# Altium PCB УШЯИ 758725.629-2.PcbDoc (part 2 of 2)
Units mm, origin at the board's own origin, x right, y up, seen from the top; angles counter-clockwise.
Board outline 110 x 150 mm, 2 copper layers (Top Layer, Bottom Layer), stack 1.569 mm thick; 205 components, 137 nets, 716 pads, 161 vias.
Unrouted connection lines stored in the file: 8.
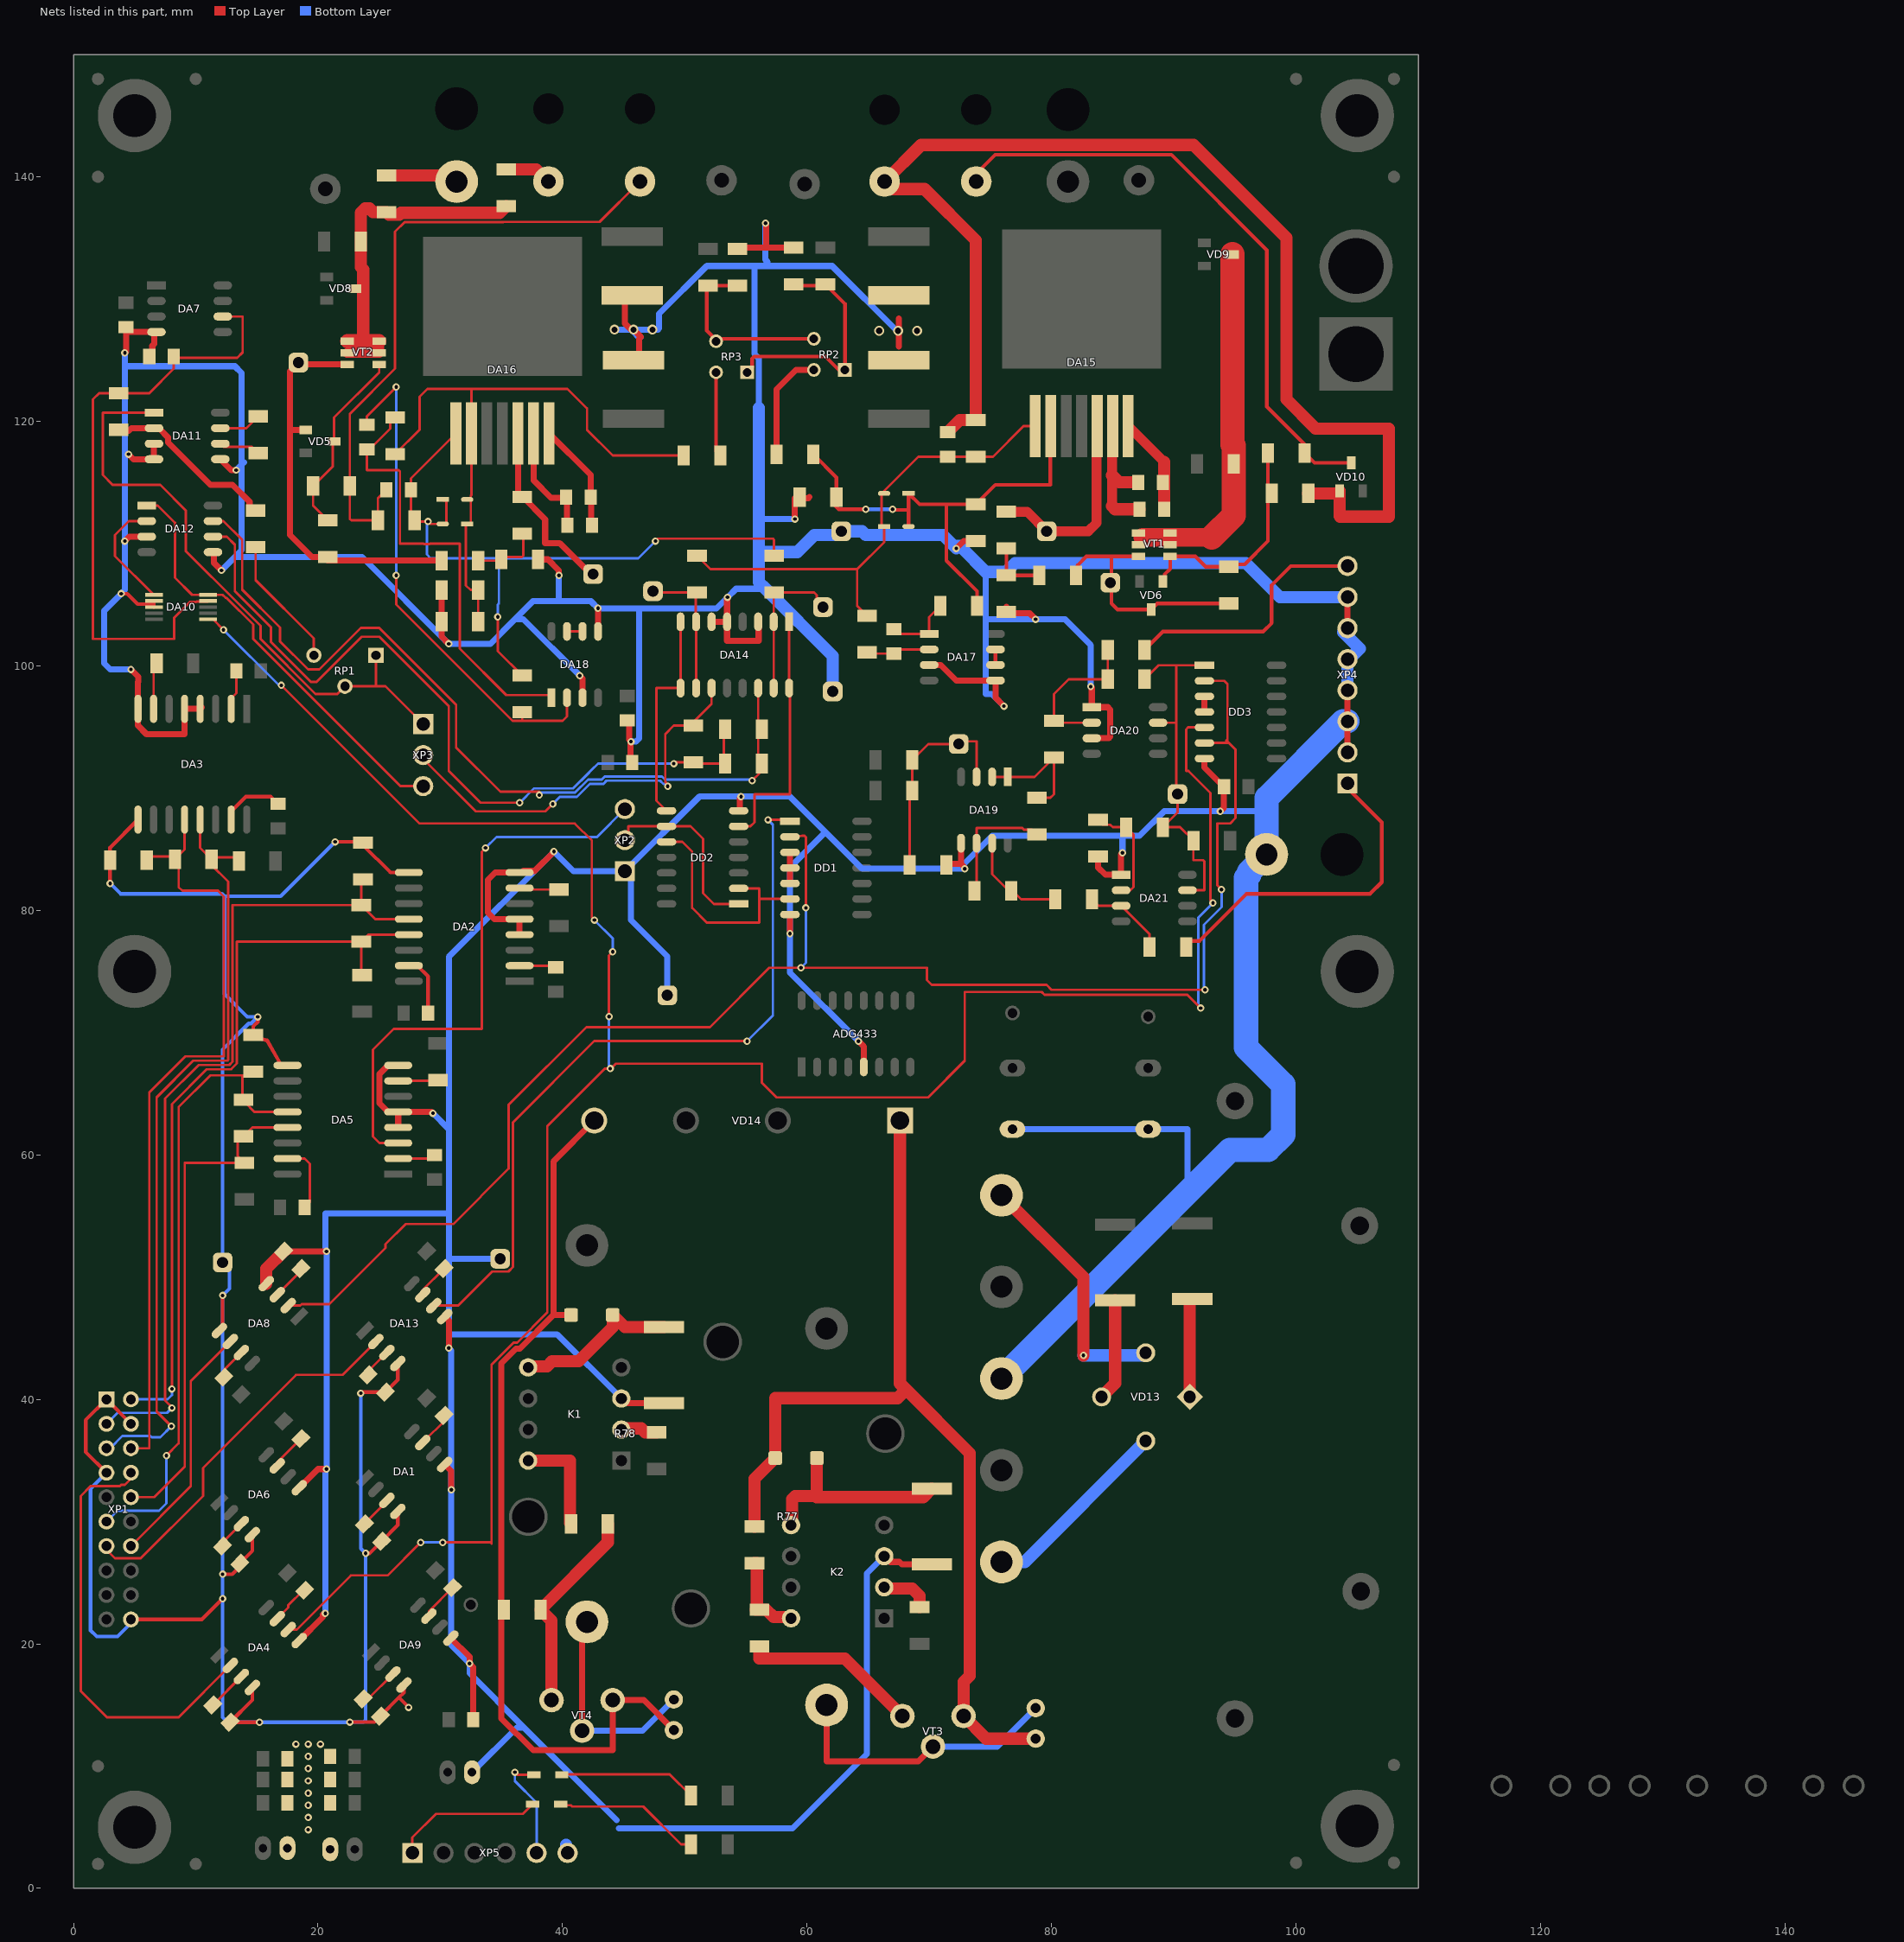
[diagram p2: the nets of this part, all layers, seen from the top]

## Via types
v1: diameter 0.6, hole 0.3, Top Layer to Bottom Layer, 155 vias
v2: diameter 0.8, hole 0.5, Top Layer to Bottom Layer, 6 vias

## Nets (pads, with @x,y where several pads share a name; then routed paths per layer and width w, separated by ;. In a path a pad name is that pad's centre, name@x,y a point inside that pad or via, vN(x,y) a via of type N, cw(c..) or ccw(c..) an arc to the next point about the centre after c; other vN are vias at no path point) (continued)
ENB_DA2: DA4.6 DA10.6 DD3.5 | length 205.2
  Top Layer w0.2: DA10.6@11.025,103.8 11.411,103.8 v1(12.267,102.944) ; v1(17,98.4) 28.3,87.1 41,87.1 42.4,85.7 42.4,79.4 v1(42.6,79.2) ; DA4.6@17.567,21.169 18.269,21.169 22.7,25.6 25.7,25.6 v1(28.4,28.3) ; v1(30.2,28.3) 34.1,28.3 34.2,28.2 34.2,42.853 35.997,44.65 36.296,44.65 38.753,47.107 38.753,62.353 43.45,67.05 43.949,67.05 44.349,67.45 56.3,67.45 56.3,65.9 57.5,64.7 69.9,64.7 72.9,67.7 72.9,73.324 79.191,73.324 79.416,73.1 91.1,73.1 v1(92.2,72) ; v1(43.8,71.3) 43.8,76.3 v1(44.1,76.6) ; DD3.5@92.5,94.96 91.16,94.96 91,94.8 91,91.4 91.2,91.4 93,89.6 93,80.8 v1(93.2,80.6)
  Bottom Layer w0.2: v1(12.267,102.944) 16.811,98.4 v1(17,98.4) ; v1(28.4,28.3) v1(30.2,28.3) ; v1(42.6,79.2) 44.1,77.7 v1(44.1,76.6) ; v1(43.8,71.3) 43.8,67.15 v1(43.9,67.05) ; v1(92.2,72) 92,72.2 92,79.4 v1(93.2,80.6)
GND: ADG433.5 C12.2 C16.1 C17.1 C22.1 C23.1 C26.1 C29.2 C30.1 C31.2 C36.1 C37.1 C38.2 C39.2 C40.1 C41.2 C42.2 C43.1 C44.2 C45.2 C46.1 C47.1 C48.1 C49.2 C50.1 C51.2 C54.2 DA1.5 DA2.4 DA2.5 DA2.8 DA3.4 DA3.5 DA3.8 DA4.5 DA5.4 DA5.5 DA5.8 DA6.5 DA7.4 DA8.4 DA9.5 DA10.2 DA10.3 DA11.3 DA11.4 DA11.5 DA12.3 DA12.5 DA13.5 DA14.3 DA14.5 DA14.6 DA17.3 DA17.5 DA18.3 DA18.5 DA19.5 DA20.1 DA20.3 DA21.1 DD1.7 DD2.7 DD3.7 K1.3 K2.3 kt??.1 pad.4 pad.TH@75.9,41.7 R19.1 R20.2 R24.1 R27.1 R56.1 R67.2 R68.1 R69.1 XP2.1 XP4.2 XP4.3 XP4.4 XP4.5 XP4.6 XP4.7 XP5.6 КТ9.1 КТ10.1 КТ12.1 | length 848.7
  Top Layer w0.2: DA18.3@41.635,97.388 DA18.3@41.635,97.888
  Top Layer w0.3: v1(3.9,105.9) 4.4,105.9 5.25,105.05 6.575,105.05 ; DA10.3@6.575,104.8 6.575,105.05 ; DA10.2@6.575,105.3 6.575,105.05
  Top Layer w0.5: v1(4.2,110.2) 4.565,110.565 DA12.3@5.988,110.565 ; v1(4.2,125.6) 4.3,125.7 C12.2@4.3,127.7 4.304,127.696 4.304,127.297 DA7.4@6.683,127.297 ; v1(4.5,117.3) 4.905,116.895 DA11.4@6.588,116.895 DA11.3@6.588,118.165 ; v1(4.7,99.7) 5.3,99.1 5.3,98.7 5.28,98.68 DA3.8@5.28,96.476 5.28,95.1 5.99,94.39 9.09,94.39 DA3.5@9.09,96.476 DA3.4@10.36,96.476 DA3.4@10.49,96.606 ; C16.1@6.2,125.3 6.45,125.55 6.45,126.175 6.614,126.339 6.614,127.228 DA7.4@6.683,127.297 ; DA7.4@7.034,127.297 DA7.4@6.787,127.297 DA7.4@6.683,127.297 ; DA12.5@11.412,109.295 11.5,109.207 11.5,108.4 v1(12.1,107.8) ; DA11.5@12.012,116.895 12.8,116.107 12.8,116.1 12.9,116 v1(13.3,116) ; C17.1@17.193,52.107 20.693,52.107 v1(20.7,52.1) ; DA4.5@18.465,20.271 20.4,22.206 20.4,22.4 20.5,22.5 v1(20.6,22.5) ; DA6.5@18.465,32.771 19.994,34.3 v1(20.7,34.3) ; DA5.4@26.562,62.237 DA5.5@26.562,63.507 ; DA5.8@26.562,67.317 25.726,67.317 25.013,66.604 25.013,64.22 25.726,63.507 DA5.5@26.562,63.507 ; v1(29.4,63.4) 29.293,63.507 DA5.5@26.562,63.507 ; R27.1@30.1,106.2 C23.1@30.1,103.6 30.1,102.4 v1(30.7,101.8) ; DA1.5@30.365,34.671 30.9,34.135 v1(30.9,32.6) ; DA13.5@30.365,46.771 30.7,46.435 v1(30.7,44.2) ; DA9.5@30.865,20.471 32.4,18.935 v1(32.4,18.4) 32.7,18.1 C48.1@32.7,13.8 ; DA2.4@36.484,78.011 DA2.5@36.484,79.281 34.419,79.281 33.9,79.8 33.9,82.5 34.491,83.091 DA2.8@36.484,83.091 36.928,83.091 36.8,83.219 37.719,83.219 v1(39.3,84.8) ; C36.1@38,108.7 38.8,108.7 39.7,107.8 v1(39.7,107.4) ; v1(41.4,99.2) 41.635,98.965 DA18.3@41.635,97.888 ; v1(42.9,104.7) 42.905,104.695 DA18.5@42.905,102.812 ; K1.3@44.81,40.07 45.18,39.7 R69.1@48.3,39.7 ; C42.2@45.3,95.534 45.466,95.534 45.466,93.934 v1(45.6,93.8) 45.55,93.75 45.55,92.25 C41.2@45.7,92.1 ; C31.2@45.7,130.3 45.6,130.3 45.1,129.8 45.1,128 45.6,127.5 v2(45.8,127.5) 46.4,126.9 46.25,126.75 46.25,125.45 C30.1@45.8,125 ; DA14.6@52.19,103.6 DA14.5@53.46,103.6 ; v1(53.5,105.6) 53.46,105.56 DA14.5@53.46,103.6 ; R19.1@54.3,134.1 54.4,134.2 56.65,134.2 ; DD2.7@54.4,88.14 54.5,88.24 54.5,89.2 v1(54.6,89.3) ; DA14.3@56,103.6 56.04,103.56 56.04,102.04 53.46,102.04 DA14.5@53.46,103.6 ; v1(56.6,136.2) 56.65,136.15 56.65,134.2 ; v1(58.6,78.1) DD1.7@58.6,79.66 ; R20.2@58.9,134.2 56.65,134.2 ; v1(59,112) 59,113.7 60.1,113.7 60.2,113.8 ; v1(64.2,69.3) 64.635,68.865 ADG433.5@64.635,67.188 ; K2.3@66.31,27.17 66.345,27.17 66.815,26.7 67.55,26.7 67.75,26.5 R68.1@70.2,26.5 ; 67.5,126.1 67.5,127.25 67.5,128.4 ; DA17.3@69.988,100.065 70.935,100.065 72.205,98.795 DA17.5@75.412,98.795 75.412,97.388 v1(76.1,96.7) ; R56.1@71.4,83.7 71.495,83.795 72.595,83.795 ; v1(72.2,109.6) 72.8,110.2 C22.1@73.8,110.2 ; DA19.5@72.595,85.488 72.595,83.795 ; v1(72.9,83.4) 72.9,83.49 72.595,83.795 ; C37.1@76.3,104.834 C37.1@76.3,104.4 76.3,104.3 78.2,104.3 v1(78.7,103.8) ; v1(83.2,98.3) 83.288,98.212 DA20.1@83.288,96.611 84.595,96.611 84.8,96.406 84.8,94.2 84.671,94.071 DA20.3@83.288,94.071 ; R67.2@83.8,84.4 83.8,83.5 84.395,82.905 DA21.1@85.688,82.905 85.688,84.588 v1(85.8,84.7) ; DD3.7@92.5,92.42 92.5,91.68 C54.2@94.09,90.09 ; v1(93.8,88.1) 94.1,88.4 C54.2@94.1,90.1 ; XP4.2@104.2,92.92 XP4.4@104.2,98 ; XP4.6@104.2,103.08 XP4.7@104.2,105.62
  Top Layer w1: DA8.4@15.771,49.465 15.771,50.685 C17.1@17.193,52.107
  Bottom Layer w0.5: v1(4.2,125.6) 4.2,124.5 ; v1(4.7,99.7) 3,99.7 2.5,100.2 2.5,104.5 v1(3.9,105.9) 4.2,106.2 v1(4.2,110.2) 4.2,124.5 ; v1(12.1,107.8) 13.201,108.901 ; v1(13.3,116) 13.75,116.45 ; 13.95,116.65 13.75,116.45 ; v1(20.6,22.5) 20.6,34.2 v1(20.7,34.3) v1@20.7,52 ; v1(20.7,52.1) v1@20.7,52 ; v1(29.4,63.4) 30.7,62.1 ; C39.2@32.6,9.5 36.25,13.15 36.85,13.15 ; КТ10.1@34.9,51.5 30.7,51.5 ; v1(39.7,107.4) 39.7,105.451 39.876,105.276 ; v1(41.4,99.2) 36.8,103.8 36.1,103.8 ; v2(44.25,127.5) 45.65,127.5 45.75,127.6 45.85,127.5 v2(47.35,127.5) 47.8,127.5 47.9,127.6 47.9,128.8 51.8,132.7 55.7,132.7 ; 44.417,5.583 36.843,13.157 32.4,17.6 v1(32.4,18.4) 30.9,19.9 v1(30.9,32.6) 30.9,44 v1(30.7,44.2) 30.7,45.318 ; 44.6,4.9 58.8,4.9 64.9,11 64.9,25.76 K2.3@66.31,27.17 ; K1.3@44.81,40.07 39.562,45.318 30.7,45.318 ; v1(45.6,93.8) 46.029,93.8 46.269,94.039 46.269,104.7 ; v2(45.8,127.5) 45.8,127.3 46.2,126.9 46.4,126.9 ; КТ12.1@48.567,73.05 48.567,76.233 45.6,79.2 45.6,82.7 XP2.1@45.1,83.2 ; 56.06,111.8 56.26,112 v1(59,112) ; 56.06,121.1 56.06,125.141 55.7,125.501 55.7,132.7 ; 56.6,106.3 54.2,106.3 v1(53.5,105.6) 52.6,104.7 46.269,104.7 ; v1(56.6,136.2) 56.6,133.2 56.75,133.05 56.75,132.7 ; v1(64.2,69.3) 58.6,74.9 v1(58.6,78.1) 58.6,83.5 61.495,86.395 ; v2@67.45,127.3 v2(67.45,127.4) ; v2@67.5,127.25 62.05,132.7 56.75,132.7 ; v1(72.2,109.6) 72.7,109.6 ; v1(72.9,83.4) 72.445,83.4 ; 74.621,107.679 74.621,103.889 ; v1(76.1,96.7) 75.1,97.7 74.621,97.7 74.621,103.889 ; C46.1@76.8,62.1 C45.2@87.9,62.1 91.119,62.1 91.119,58.081 91.7,57.5 ; v1(83.2,98.3) 83.2,101.7 81.1,103.8 v1(78.7,103.8) 74.711,103.8 74.621,103.889 ; v1(85.8,84.7) 85.8,86.1 ; 97.9,88.1 v1(93.8,88.1) 89.2,88.1 87.2,86.1 85.8,86.1 ; 4.2,124.5 13.2,124.5 13.75,123.95 13.75,116.45 ; 13.201,108.901 23.599,108.901 v1(30.7,101.8) 34.1,101.8 36.1,103.8 ; 13.201,108.901 13.75,109.45 13.75,116.45 ; v1@20.7,52 20.6,52.1 20.6,55.2 23.26,55.2 23.272,55.212 23.728,55.212 23.74,55.2 30.7,55.2 ; 30.7,45.318 30.7,51.5 ; 30.7,51.5 30.7,55.2 ; 30.7,55.2 30.7,62.1 ; 30.7,62.1 30.7,76.2 v1(39.3,84.8) 40.9,83.2 XP2.1@45.1,83.2 ; 36.1,103.8 37.576,105.276 39.876,105.276 ; 39.876,105.276 42.324,105.276 v1(42.9,104.7) 46.269,104.7 ; XP2.1@45.1,83.2 51.2,89.3 v1(54.6,89.3) 58.59,89.3 61.495,86.395 ; 55.7,132.7 56.75,132.7 ; 61.495,86.395 64.49,83.4 72.445,83.4 ; 72.445,83.4 75.145,86.1 85.8,86.1
  Bottom Layer w1: XP5.6@40.296,3.579 40.296,3.024 XP5.6@40.42,2.9 ; 56.06,121.1 56.06,111.8 56.06,109.3 ; КТ9.1@62.1,97.9 62.1,100.8 56.6,106.3 56.06,106.84 56.06,109.3 ; v1(72.2,109.6) 71.1,110.7 64.8,110.7 64.5,111 kt??.1@62.8,111 62.5,110.7 60.6,110.7 59.2,109.3 56.06,109.3 ; v1@72.2,109.8 72.7,109.8 ; 72.7,109.6 74.621,107.679 76.294,107.679 77.015,108.4 95.9,108.4 98.68,105.62 XP4.7@104.2,105.62 ; XP4.6@103.86,102.74 105.2,101.4 104.2,100.4 XP4.4@104.2,98
  Bottom Layer w2: pad.TH@75.9,41.7 91.7,57.5 94.6,60.4 97.7,60.4 98.951,61.651 98.951,65.749 95.9,68.8 95.9,82.649 96.15,82.899 96.15,83.133 pad.4@97.585,84.568 97.585,89.185 103.86,95.46 XP4.3@104.2,95.46
  other v1: 19.2,4.8 19.2,5.8 19.2,6.8 19.2,7.8 19.2,8.8 19.2,9.8 19.2,10.8 18.2,11.8 19.2,11.8 20.2,11.8
  other v2: 65.9,127.4 69,127.4
GNDN: C1.1 C5.1 C7.1 C15.1 C19.1 DA1.4 DA2.9 DA3.9 DA4.4 DA5.9 DA6.4 DA8.5 DA9.4 DA13.4 R2.1 R4.1 R6.1 XP1.1 XP1.4 XP1.7 XP1.20 КТ1.1 | length 215.4
  Top Layer w0.3: XP1.7@2.7,34 1,35.7 1,38.3 XP1.1@2.7,40 XP1.4@4.7,38 ; v1(3,82.2) 2.991,82.209 R4.1@2.991,84.097 2.991,85.131 DA3.9@5.28,87.42 ; XP1.20@4.7,22 10.5,22 v1(12.2,23.7) ; DA8.5@11.935,45.629 12.2,45.894 v1(12.2,48.5) ; v1(12.2,25.7) 12.99,25.7 C7.1@13.745,26.455 ; C7.1@13.607,26.593 14.629,27.615 DA6.4@14.629,28.935 ; DA4.4@14.629,16.435 14.629,15.415 C5.1@12.807,13.593 v1(15.207,13.593) ; R6.1@14.666,69.674 15.829,69.362 16.92,67.474 DA5.9@17.506,67.317 ; R6.1@14.7,69.8 14.7,70.5 15.071,70.871 v1(15.071,71.282) ; v1(21.4,85.6) 23.602,85.6 R2.1@23.68,85.521 ; v1(22.6,13.6) 24.614,13.6 C15.1@25.107,14.093 26.623,15.609 ; v1(23.5,40.5) 23.586,40.586 C19.1@25.514,40.586 26.529,41.601 DA13.4@26.529,42.935 ; R2.1@23.692,85.332 25.932,83.091 DA2.9@27.428,83.091 ; v1(23.9,27.4) 24.214,27.4 C1.1@25.207,28.393 26.529,29.715 DA1.4@26.529,30.835 ; DA9.4@27.029,16.635 27.029,16.015 26.623,15.609 ; v1(27.4,14.8) 27.4,14.832 26.623,15.609
  Bottom Layer w0.3: XP1.7@2.7,34 1.4,32.7 1.4,21.1 1.9,20.6 3.6,20.6 4.7,21.7 XP1.20@4.7,22 ; v1(3,82.2) 3.85,81.35 12.145,81.35 12.35,81.145 ; v1(21.4,85.6) 16.945,81.145 12.35,81.145 ; v1@23.5,40.543 v1(23.5,40.5) 23.5,27.8 v1(23.9,27.4) 23.9,13.785 23.715,13.6 22.615,13.6 22.565,13.65 22.512,13.596 15.211,13.596 v1(15.207,13.593) 12.6,13.593 12.2,13.993 12.2,23.69 v1(12.2,23.7) v1(12.2,25.7) v1(12.2,48.5) 12.75,49.05 12.75,50.65 КТ1.1@12.2,51.2 12.2,68.611 14.335,70.746 14.535,70.746 v1(15.071,71.282) 14.2,71.282 14.2,71.3 12.35,73.15 12.35,81.145
IMPc: DA5.3 XP2.3 | length 46.6
  Top Layer w0.2: DA5.3@26.562,60.967 25.033,60.967 24.5,61.5 24.5,68.6 26.2,70.3 33.4,70.3 33.4,79.593 33.4,84.8 v1(33.7,85.1)
  Bottom Layer w0.2: v1(33.7,85.1) 34.6,86 42.82,86 XP2.3@45.1,88.28
LIMIT: DA13.6 DD1.1 | length 62.5
  Top Layer w0.2: DA13.6@29.467,47.669 31.469,47.669 34.25,50.45 35.569,50.45 35.95,50.831 35.95,62.65 42.6,69.3 v1(55.1,69.3) ; v1(56.8,87.4) 57.98,87.4 58.1,87.28 DD1.1@58.6,87.28
  Bottom Layer w0.2: v1(55.1,69.3) 57.2,71.4 57.2,87 v1(56.8,87.4)
LIMITn: DA13.2 XP1.13 | length 31.3
  Top Layer w0.2: XP1.13@2.7,28 2.7,27.7 3.4,27 5.5,27 10.6,32.1 10.6,34.4 18.2,42 22.002,42 DA13.2@24.733,44.731
LM+: R63.2 XP4.1 | length 27.5
  Top Layer w0.3: R63.2@91,77 91,77.15 91.35,77.5 92.1,77.5 95.95,81.35 106.05,81.35 107,82.3 107,87.2 104.2,90 XP4.1@104.2,90.38
LM-: R61.1 XP4.8 | length 21.3
  Top Layer w0.3: R61.1@87.6,101.3 89.1,102.8 97.3,102.8 98,103.5 98,106.6 99.56,108.16 XP4.8@104.2,108.16
Net2: pad.2 R48.2 VD10.3 | length 52.7
  Top Layer w0.2: pad.2@73.839,139.606 pad.2@74.475,139.606
  Top Layer w0.3: pad.2@74.475,139.606 74.025,139.156 73.652,139.156 73.389,139.42 73.389,139.792 75.396,141.8 89.8,141.8 97.606,133.994 97.606,121.194 100.7,118.1 R48.2@100.7,117.4 101.5,116.6 VD10.3@104.5,116.6
Net3: C24.2 pad.3 R28.2 R47.1 VD10.1 | length 102.7
  Top Layer w1: C24.2@71.5,119.1 72.5,120.1 R28.2@73.8,120.1 73.8,134.8 69.61,138.99 66.954,138.99 pad.3@66.338,139.606 69.332,142.6 91.6,142.6 99.2,135 99.2,121.8 101.6,119.4 107.6,119.4 107.6,112.2 103.6,112.2 103.55,112.25 VD10.1@103.55,114.3 103.35,114.1 R47.1@101,114.1
Net5: C25.2 pad.5 R29.2 R45.2 | length 51.9
  Top Layer w0.2: C25.2@25.6,114.4 24.9,113.7 R29.2@24.9,111.9 22.717,111.9 22.6,112.017 R45.2@22.6,114.7 22.6,120.6 26.3,124.3 26.3,135.5 27.095,136.295 35.156,136.295 35.161,136.3 43.033,136.3 pad.5@46.339,139.606
Net6: pad. R50.2 | length 3.9
  Top Layer w1: R50.2@35.4,140.6 37.844,140.6 pad.@38.838,139.606
Net7: pad.7 R51.2 | length 5.9
  Top Layer w1: R51.2@25.6,140.1 30.844,140.1 pad.7@31.338,139.606
Net8: pad.TH@75.9,56.7 VD13.2 | length 21.2
  Top Layer w1: pad.TH@75.9,56.7 82.6,50 v1(82.6,43.6)
  Bottom Layer w1: v1(82.6,43.6) 87.7,43.6 VD13.2@87.7,43.806
Net12: pad.TH@75.9,26.7 VD13.4 | length 15.9
  Bottom Layer w1: pad.TH@75.9,26.7 77.806,26.7 VD13.4@87.7,36.594
Net17: R75.2 R77.2 VT3.2 | length 23.5
  Top Layer w0.5: R77.2@61.6,15 61.6,10.4 69.1,10.4 VT3.2@70.3,11.6
  Bottom Layer w0.5: VT3.2@70.3,11.6 75.55,11.6 R75.2@78.7,14.75
Net18: R76.2 R78.1 VT4.2 | length 17.6
  Top Layer w0.5: VT4.2@41.6,12.9 41.6,21.4 R78.1@42,21.8
  Bottom Layer w0.5: VT4.2@41.6,12.9 46.55,12.9 R76.2@49.1,15.45
NetC1_2: C1.2 DA1.3 | length 2.7
  Top Layer w0.2: C1.2@23.793,29.807 25.631,31.646 DA1.3@25.631,31.733
NetC2_2: C2.2 DA1.7 | length 2.7
  Top Layer w0.2: DA1.7@28.569,36.467 30.495,38.393 C2.2@30.507,38.393
NetC3_1: C3.1 DA2.15 | length 4.9
  Top Layer w0.3: DA2.15@27.428,75.471 28.129,75.471 29,74.6 C3.1@29,71.6
NetC4_1: C4.1 DA3.15 | length 5.2
  Top Layer w0.3: DA3.15@12.9,87.42 12.9,88.1 14.1,89.3 16.127,89.3 C4.1@16.724,88.703
NetC5_2: C5.2 DA4.3 | length 3.3
  Top Layer w0.2: C5.2@11.393,15.007 11.405,15.007 DA4.3@13.731,17.333
NetC6_1: C6.1 DA5.15 | length 5.8
  Top Layer w0.2: DA5.15@17.506,59.697 18.903,59.697 19.336,59.264 19.336,56.136 C6.1@18.9,55.7
NetC7_2: C7.2 DA6.3 | length 2.5
  Top Layer w0.2: C7.2@12.193,28.007 12.193,28.295 DA6.3@13.731,29.833
NetC8_2: C8.2 DA4.7 | length 3.3
  Top Layer w0.2: DA4.7@16.669,22.067 17.569,22.967 17.569,23.167 18.795,24.393 C8.2@18.907,24.393
NetC9_2: C9.2 DA6.7 | length 3
  Top Layer w0.2: DA6.7@16.669,34.567 16.669,34.854 C9.2@18.607,36.793
NetC10_1: C10.1 DA2.2 | length 3
  Top Layer w0.2: DA2.2@36.484,75.471 39.312,75.471 C10.1@39.449,75.334
NetC11_1: C11.1 DA5.2 | length 3.1
  Top Layer w0.2: DA5.2@26.562,59.697 29.239,59.697 C11.1@29.526,59.984
NetC13_1: C13.1 DA3.2 | length 3.3
  Top Layer w0.2: DA3.2@12.9,96.476 12.9,97.334 13.32,97.754 C13.1@13.32,99.583
NetC14_2: C14.2 DA8.7 | length 2.6
  Top Layer w0.2: C14.2@12.293,41.807 12.293,42.395 DA8.7@13.731,43.833
NetC15_2: C15.2 DA9.3 | length 3.3
  Top Layer w0.2: C15.2@23.693,15.507 24.105,15.507 DA9.3@26.131,17.533
NetC16_2: C16.2 DA7.6 DA10.9 R13.1 | length 50.4
  Top Layer w0.2: DA10.9@11.025,105.3 10.975,105.25 10.067,105.25 10.037,105.219 9.519,105.219 8.225,103.925 8.225,102.2 1.6,102.2 1.6,116.3 1.6,121.8 2.1,122.3 R13.1@3.7,122.3 6.2,122.3 8.2,124.3 C16.2@8.2,125.3 8.3,125.2 13.4,125.2 13.833,125.633 13.833,128.567 DA7.6@12.211,128.567
NetC17_2: C17.2 DA8.3 | length 2.9
  Top Layer w0.2: DA8.3@16.669,48.567 18.607,50.505 C17.2@18.607,50.693
NetC18_2: C18.2 DA9.7 | length 3.1
  Top Layer w0.2: DA9.7@29.069,22.267 29.069,22.654 C18.2@31.007,24.593
NetC19_2: C19.2 DA13.3 | length 2.5
  Top Layer w0.2: C19.2@24.1,42 24.1,42.302 DA13.3@25.631,43.833
NetC20_2: C20.2 DA13.7 | length 2.8
  Top Layer w0.2: DA13.7@28.569,48.567 28.569,48.954 C20.2@30.307,50.693
NetC21_1: C21.1 DA12.6 R15.2 R16.1 | length 64.2
  Top Layer w0.2: DA12.6@11.412,110.565 12.535,110.565 13.2,109.9 13.2,106.1 16.15,103.15 16.15,101.95 17.35,100.75 18.75,99.35 19.425,98.675 19.875,98.675 23.57,102.37 25.03,102.37 30.7,96.7 30.7,91.4 33.3,88.8 v1(36.5,88.8) ; v1(49.1,92) 49.2,92.1 R15.2@50.7,92.1 50.8,92 R16.1@53.3,92 ; R16.1@53.3,92.1 53.2,92.2 53.2,94.7 C21.1@53.3,94.8
  Bottom Layer w0.2: v1(36.5,88.8) 37.674,89.974 40.874,89.974 42.073,91.173 42.35,91.45 42.9,92 v1(49.1,92)
NetC21_2: C21.2 DA12.7 DA14.14 R16.2 | length 70.6
  Top Layer w0.2: DA12.7@11.412,111.835 12.265,111.835 13.8,110.3 13.8,106.23 16.9,103.13 16.9,101.99 19.19,99.7 20.1,99.7 23.5,103.1 25,103.1 31.3,96.8 31.3,93.312 34.912,89.7 38.1,89.7 v1(38.1,89.424) ; v1(55.5,90.6) 56.1,91.2 56.1,91.8 R16.2@56.3,92 56,92.3 56,94.5 C21.2@56.3,94.8 56,95.1 DA14.14@56,98.176
  Bottom Layer w0.2: v1(38.1,89.424) 38.1,89.624 41.019,89.624 42.095,90.7 43.205,90.7 43.455,90.95 47.845,90.95 48.128,90.95 48.378,90.7 55.4,90.7 v1(55.5,90.6)
NetC22_2: C22.2 DA15.2 R24.2 R25.2 R31.1 VD1.2 VD3.1 | length 37.8
  Top Layer w0.3: R25.2@60.5,117.3 62.4,115.4 R24.2@62.4,113.8 ; R24.2@62.15,113.25 62.6,112.8 v1(64.8,112.8) ; v1(67,112.8) 67.05,112.75 68.3,112.75 ; VD1.2@68.3,111.4 68.3,112.75 ; C22.2@73.2,113.2 71.4,113.2 ; C22.2@73.8,113.2 75.4,114.8 79.9,114.8 79.9,117.81 DA15.2@79.92,117.83 ; R31.1@73.9,104.9 73.9,106.1 71.4,108.6 71.4,113.2 ; 68.3,112.75 VD3.1@68.3,114.1 69.2,113.2 71.4,113.2
  Bottom Layer w0.3: v1(64.8,112.8) v1(67,112.8)
NetC23_2: C23.2 DA16.2 R26.2 R27.2 R33.1 VD2.2 VD4.1 | length 51.2
  Top Layer w0.2: R33.1@26.3,117.3 28.3,119.3 28.3,122 28.95,122.65 32.9,122.65 ; C23.2@33.1,103.6 R27.2@33.1,105.6 ; R27.2@33.1,106.2 32.475,106.2 32.1,106.575 32.1,111.6 VD4.1@32.2,111.6 32.5,111.6 32.5,113.511 32.411,113.6 VD2.2@32.2,113.6 32.5,113.6 32.5,113.9 32.55,113.95 DA16.2@32.55,119 32.55,122.533 32.667,122.65 32.9,122.65 ; R26.2@49.9,117.2 44.1,117.2 42,119.3 42,121.05 40.4,122.65 32.9,122.65
NetC24_1: C24.1 DA15.1 R22.2 R28.1 R30.1 VD1.1 VD3.2 | length 40.2
  Top Layer w0.2: R22.2@51,109 52.1,107.9 64.1,107.9 ; R30.1@64.9,104.1 64.1,104.9 64.1,107.9 ; VD1.1@66.1,111.4 VD1.1@66.3,111.4 66.3,110.1 64.1,107.9 ; VD1.1@66.196,111.4 66.1,111.496 VD3.2@66.1,114.011 ; DA15.1@78.65,119.6 77.7,119.6 75.2,117.1 R28.1@73.8,117.1 C24.1@71.5,117.1 69.1,117.1 66.3,114.3 VD3.2@66.3,114.1 ; VD3.2@66.1,114.011 VD3.2@66.189,114.1 ; VD3.2@66.1,114.011 VD3.2@66.189,114.1 ; VD3.2@66.189,114.1 VD3.2@66.3,114.1 ; VD3.2@66.189,114.1 VD3.2@66.3,114.1
NetC25_1: C25.1 DA16.1 R23.2 R29.1 R32.1 VD2.1 VD4.2 | length 58
  Top Layer w0.2: DA16.1@31.28,119 27.6,115.32 C25.1@27.6,114.4 27.6,111.9 27.6,111.8 v1(29,111.8) 29.2,111.6 VD4.2@30.2,111.6 30.5,111.6 VD2.1@30.5,113.504 ; v1(34.7,104) 34.7,101.2 R32.1@36.7,99.2 ; v1(47.6,110.2) 47.8,110.4 57.2,110.4 57.3,110.3 R23.2@57.3,109 ; VD2.1@30.5,113.504 30.296,113.504 VD2.1@30.2,113.6 30.403,113.6 VD2.1@30.5,113.504
  Bottom Layer w0.2: v1(29,111.8) 28.9,111.7 28.9,109.1 29.2,108.8 34.8,108.8 ; v1(34.7,104) 34.7,105 34.8,105.1 34.8,108.8 ; v1(47.6,110.2) 46.2,108.8 34.8,108.8
NetC27_1: C27.1 C32.1 DA15.7 | length 7.9
  Top Layer w0.8: DA15.7@86.27,119.6 89.2,116.67
  Top Layer w1: C27.1@89.2,112.925 89.2,116.67
NetC27_2: C27.2 C32.2 DA15.6 | length 11.2
  Top Layer w0.8: 84.945,113.055 DA15.6@84.945,119.545
  Top Layer w1: 84.945,113.055 85.2,112.8 C27.2@87.2,112.8 ; 84.945,115.586 85.531,115 C32.2@87.1,115
NetC28_1: C28.1 C33.1 DA16.7 | length 8.9
  Top Layer w0.5: DA16.7@38.9,119 42.3,115.6 C28.1@42.3,113.8 42.35,113.75 42.35,111.55 C33.1@42.4,111.5
NetC28_2: C28.2 C33.2 DA16.6 | length 9.6
  Top Layer w0.5: DA16.6@37.63,119 37.63,115.17 39.05,113.75 40.35,113.75 40.35,111.875 40.525,111.7 40.6,111.7 C33.2@40.4,111.5
NetC34_1: C34.1 DA17.1 R31.2 | length 5.7
  Top Layer w0.2: C34.1@67.1,103 67.495,102.605 DA17.1@69.988,102.605 69.988,103.988 R31.2@70.9,104.9
NetC34_2: C34.2 DA17.2 R30.2 | length 5.3
  Top Layer w0.2: R30.2@64.9,101.1 65,101 C34.2@67.1,101 67.435,101.335 DA17.2@69.988,101.335
NetC35_1: C35.1 DA18.1 R33.2 | length 36.7
  Top Layer w0.2: R33.2@26.3,120.3 25.9,119.9 25.9,119.4 24.2,117.7 C35.1@24,117.7 24,116 26.6,116 26.699,115.901 26.699,110 28.622,110 28.672,109.95 29.128,109.95 29.178,110 31.6,110 31.6,101.4 35.4,97.6 38.883,97.6 DA18.1@39.095,97.388
NetC35_2: C35.2 DA18.2 R32.2 | length 42.2
  Top Layer w0.2: C35.2@24,119.7 24,120.4 v1(26.4,122.8) ; v1(26.4,107.4) 26.4,105 35.9,95.5 36.7,95.5 ; R32.2@36.7,96.2 36.7,95.5 ; DA18.2@40.365,97.388 40.365,95.865 40,95.5 36.7,95.5
  Bottom Layer w0.2: v1(26.4,107.4) v1(26.4,122.8)
NetC36_2: C36.2 R34.2 R36.1 | length 5.7
  Top Layer w0.2: R36.1@33.1,108.6 34.9,108.6 35.2,108.9 36.683,108.9 36.8,109.017 36.8,110.7 R34.2@36.7,110.8
NetC37_2: C37.2 R35.2 R39.1 | length 4.9
  Top Layer w0.3: R35.2@76.3,109.6 C37.2@76.3,107.4 R39.1@79,107.4
NetC52_1: C52.1 C53.2 DA20.7 DA21.7 DD3.1 R70.1 КТ11.1 | length 29.9
  Top Layer w0.2: C52.1@87.6,98.9 88.74,100.04 90.2,100.04 ; DA20.7@88.712,95.341 90.2,95.341 ; DA21.7@91.112,81.635 92.5,81.635 92.5,84 92.4,84.1 91.6,84.1 R70.1@91.6,85.7 90.5,86.8 C53.2@89.1,86.8 90.3,88 КТ11.1@90.3,89.5 90.3,89.9 90.2,90 90.2,95.341 ; DD3.1@92.5,100.04 90.2,100.04 ; 90.2,95.341 90.2,100.04
NetC52_2: C52.2 DA20.2 R61.2 R62.2 | length 12.4
  Top Layer w0.2: DA20.2@83.288,95.341 80.359,95.341 R62.2@80.2,95.5 80.2,97.7 81.4,98.9 C52.2@84.6,98.9 ; C52.2@84.6,99.2 R61.2@84.6,101.3
NetC53_1: C53.1 DA21.2 R67.1 | length 8.8
  Top Layer w0.2: R67.1@83.8,87.4 84.2,87 84.8,87 85,86.8 85.465,86.8 ; 85.5,86.8 C53.1@86.1,86.8 86.7,86.2 86.7,83.334 ; DA21.2@85.688,81.635 86.435,81.635 86.7,81.9 86.7,82.476 86.7,83.334
NetDA2_7: DA2.7 R12.2 | length 3.3
  Top Layer w0.2: DA2.7@36.484,81.821 36.602,81.703 39.697,81.703 R12.2@39.7,81.7
NetDA2_12: DA2.12 R2.2 R7.1 XP1.3 | length 68.1
  Top Layer w0.2: v1(8.05,39.3) 8.075,39.325 7.5,39.9 7.5,64.6 10.25,67.35 12.745,67.35 13,67.605 13,80.43 R7.1@23.539,80.43 ; R2.2@23.68,82.521 23.539,82.38 R7.1@23.539,80.43 ; DA2.12@27.428,79.281 24.688,79.281 R7.1@23.539,80.43
  Bottom Layer w0.2: XP1.3@2.7,38 3.6,38.9 7.65,38.9 v1(8.05,39.3)
NetDA2_13: DA2.13 R1.1 R7.2 XP1.2 | length 61
  Top Layer w0.2: v1(8.05,40.85) 8.05,64.15 10.9,67 12.89,67 13.35,67.46 13.35,77.43 R7.2@23.539,77.43 ; R1.1@23.61,74.703 23.539,74.773 R7.2@23.539,77.43 ; DA2.13@27.428,78.011 24.12,78.011 R7.2@23.539,77.43
  Bottom Layer w0.2: XP1.2@4.7,40 7.7,40 8.05,40.35 v1(8.05,40.85)
NetDA3_7: DA3.7 R10.2 | length 3.8
  Top Layer w0.2: DA3.7@6.55,96.476 6.55,99.95 R10.2@6.8,100.2
NetDA3_12: DA3.12 R4.2 R8.1 XP1.6 | length 63.5
  Top Layer w0.2: XP1.6@4.7,36 6.2,36 6.2,65.1 9.1,68 9.105,68 9.155,68.05 12.3,68.05 12.3,81.124 11.824,81.6 8.9,81.6 8.6,81.9 8.6,83.862 R8.1@8.294,84.168 ; R4.2@5.991,84.097 6.291,84.397 8.065,84.397 R8.1@8.294,84.168 ; DA3.12@9.09,87.42 9.09,84.963 R8.1@8.294,84.168
NetDA3_13: DA3.13 R3.1 R8.2 XP1.5 | length 63.2
  Top Layer w0.2: v1(8,37.8) 6.8,39 6.8,64.7 9.8,67.7 12.6,67.7 12.65,67.75 12.65,82.35 11.294,83.706 R8.2@11.294,84.168 ; DA3.13@10.36,87.42 10.36,85.102 R8.2@11.294,84.168 ; R3.1@13.181,84.326 11.453,84.326 R8.2@11.294,84.168
  Bottom Layer w0.2: XP1.5@2.7,36 3,36 4,37 6.3,37 6.4,36.9 7.1,36.9 v1(8,37.8)
NetDA4_2: DA4.2 XP1.8 | length 36
  Top Layer w0.2: XP1.8@4.7,34 4.7,33.5 4.2,33 3.9,33 3.8,32.9 1.4,32.9 0.6,32.1 0.6,20.578 0.6,19.822 0.6,16.134 2.734,14 8.602,14 DA4.2@12.833,18.231
NetDA5_7: DA5.7 R11.2 | length 3.3
  Top Layer w0.2: DA5.7@26.562,66.047 29.745,66.047 R11.2@29.809,66.111
NetDA5_12: DA5.12 R6.2 R9.1 XP1.11 | length 52.5
  Top Layer w0.2: v1(7.6,35.4) 8.6,36.4 8.6,63.9 11.2,66.5 R6.2@14.4,66.5 ; 13.829,66.5 13.829,64.585 R9.1@13.899,64.515 ; R9.1@13.896,64.52 14.054,64.247 14.794,63.507 DA5.12@17.506,63.507 ; R6.2@14.029,66.5 R6.2@14.4,66.5 ; R6.2@14.4,66.5 R6.2@14.7,66.8 R6.2@14.4,66.5
  Bottom Layer w0.2: XP1.11@2.7,30 3.6,30.9 7,30.9 7.6,31.5 v1(7.6,35.4)
NetDA5_13: DA5.13 R5.1 R9.2 XP1.10 | length 41.6
  Top Layer w0.2: XP1.10@4.7,32 6.6,32 9.1,34.5 9.1,59.353 R5.1@13.97,59.353 13.423,59.9 13.423,61.038 R9.2@13.899,61.515 14.622,62.237 DA5.13@17.506,62.237
NetDA10_1: DA10.1 DA12.2 | length 9.3
  Top Layer w0.2: DA12.2@5.988,111.835 4.535,111.835 3.4,110.7 3.4,108.975 DA10.1@6.575,105.8
NetDA10_10: DA10.10 DA12.1 XP3.3 | length 35.4
  Top Layer w0.2: DA12.1@5.988,113.105 6.895,113.105 8.3,111.7 8.3,107.2 9.7,105.8 DA10.10@11.025,105.8 12.2,105.8 12.4,105.6 12.407,105.6 12.457,105.55 12.528,105.55 14.7,103.378 14.7,102.2 26.74,90.16 XP3.3@28.6,90.16
NetDA11_1: DA11.1 RP1.1 RP1.2 XP3.1 | length 49.6
  Top Layer w0.2: DA11.1@6.588,120.705 2.4,120.705 2.4,115.6 3.2,114.8 7.1,114.8 9.2,112.7 9.2,109.373 13.5,105.073 15.3,103.273 15.3,102.2 19.8,97.7 21.575,97.7 RP1.2@22.2,98.325 24.7,98.325 ; RP1.1@24.74,100.865 24.74,98.365 24.7,98.325 ; XP3.1@28.6,95.24 25.515,98.325 24.7,98.325
NetDA11_2: DA11.2 R13.2 R14.1 | length 14.2
  Top Layer w0.5: R13.2@3.7,119.3 3.775,119.225 4.523,119.225 4.734,119.435 DA11.2@6.588,119.435 ; DA11.2@6.985,119.435 7.75,118.669 7.75,118.25 11.2,114.8 13.01,114.8 14.4,113.41 14.4,112.95 14.65,112.7 R14.1@14.9,112.7
NetDA11_6: DA11.6 R17.1 | length 3.4
  Top Layer w0.2: DA11.6@12.012,118.165 12.277,117.9 14.6,117.9 R17.1@15.1,117.4
NetDA11_7: DA11.7 R17.2 | length 3.5
  Top Layer w0.2: DA11.7@12.012,119.435 14.135,119.435 R17.2@15.1,120.4
NetDA14_1: DA14.1 DA14.16 DD2.6 | length 20.7
  Top Layer w0.2: DD2.6@54.4,86.87 55.37,86.87 55.7,87.2 55.7,89.5 58.59,89.5 58.59,98.126 DA14.16@58.54,98.176 DA14.1@58.54,103.6
NetDA14_8: DA14.8 DA14.9 DD2.8 | length 17.8
  Top Layer w0.2: DD2.8@48.5,88.14 47.676,88.964 47.676,98.176 DA14.9@49.65,98.176 DA14.8@49.65,103.6
NetDA14_11: DA14.11 R15.1 XP3.2 | length 34
  Top Layer w0.2: XP3.2@28.6,92.7 28.6,92.4 32.9,88.1 38.6,88.1 v1(39.2,88.7) ; v1(48.6,90.15) 48.6,90.3 48.4,90.5 48.4,94.4 49.1,95.1 R15.1@50.7,95.1 50.7,95.4 52.19,96.89 DA14.11@52.19,98.176
  Bottom Layer w0.2: v1(39.2,88.7) 39.774,89.274 41.164,89.274 42.24,90.35 43.35,90.35 43.6,90.6 47.7,90.6 47.983,90.6 48.233,90.35 48.55,90.35 48.6,90.3 v1(48.6,90.15)
NetDA15_5: DA15.5 R35.1 КТ5.1 | length 16.3
  Top Layer w0.8: R35.1@76.3,112.6 78,112.6 КТ5.1@79.6,111 83,111 83.685,111.685 83.685,119.555 DA15.5@83.73,119.6
NetDA16_5: DA16.5 R34.1 КТ4.1 | length 15
  Top Layer w0.5: DA16.5@36.36,119 36.36,114.05 36.61,113.8 36.75,113.8 38.575,111.975 38.575,110.025 39.775,110.025 41.95,107.85 42.4,107.4 КТ4.1@42.5,107.5
NetDA17_6: DA17.6 DA17.7 | length 1.3
  Top Layer w0.3: DA17.6@75.412,100.065 DA17.7@75.412,101.335
NetDA18_6: DA18.6 DA18.7 | length 1.3
  Top Layer w0.2: DA18.7@40.365,102.812 DA18.6@41.635,102.812
NetDA19_1: DA19.1 DA19.2 R59.1 R62.1 | length 10.2
  Top Layer w0.2: DA19.2@75.135,90.912 DA19.1@76.405,90.912 78.612,90.912 R62.1@80.2,92.5 80.2,89.5 79.9,89.2 R59.1@78.8,89.2
NetDA19_3: DA19.3 R52.1 R55.1 R56.2 КТ8.1 | length 17.5
  Top Layer w0.2: R56.2@68.4,83.7 68.4,89.6 R55.1@68.6,89.8 R52.1@68.6,92.3 69.9,93.6 КТ8.1@72.4,93.6 72.615,93.815 73.865,93.815 DA19.3@73.865,90.912
NetDA19_6: DA19.6 R59.2 R60.1 | length 10.4
  Top Layer w0.2: R60.1@73.7,81.6 73.865,81.765 73.865,82.035 DA19.6@73.865,85.488 73.865,86.735 77.6,86.735 77.735,86.6 78.4,86.6 R59.2@78.8,86.2
NetDA19_7: DA19.7 R60.2 R64.2 | length 8.4
  Top Layer w0.2: DA19.7@75.135,85.488 75.135,82.965 76.2,81.9 76.4,81.9 R60.2@76.7,81.6 ; R60.2@76.8,81.6 77.5,80.9 R64.2@80.3,80.9
NetDA21_3: DA21.3 R63.1 R64.1 | length 6.9
  Top Layer w0.2: R64.1@83.3,80.9 83.835,80.365 DA21.3@85.688,80.365 88,78.053 R63.1@88,77
NetDD1_3: DD1.3 DD1.4 DD1.5 | length 2.5
  Top Layer w0.5: DD1.5@58.6,82.2 DD1.4@58.6,83.47 DD1.3@58.6,84.74
NetDD1_6: DD1.6 DD2.2 DD2.10 | length 19.9
  Top Layer w0.2: DD2.10@48.5,85.6 49.8,85.6 50.6,84.8 50.6,80.2 51.8,79 56.1,79 56.1,80.93 ; DD2.2@54.4,81.79 56.1,81.79 ; 56.1,81.69 56.1,80.93 ; DD1.6@58.6,80.93 56.1,80.93
NetDD2_1: DD2.1 DD2.9 XP2.2 | length 15.5
  Top Layer w0.2: XP2.2@45.1,85.74 45.37,86.01 45.37,86.87 DD2.9@48.5,86.87 50.47,86.87 51.5,85.84 51.5,81.4 52.38,80.52 DD2.1@54.4,80.52
NetDD3_3: DD3.3 DD3.4 | length 1.3
  Top Layer w0.5: DD3.4@92.5,96.23 DD3.3@92.5,97.5
NetK1_2: K1.2 R65.2 | length 3.1
  Top Layer w1: K1.2@44.81,37.53 44.906,37.626 46.426,37.626 46.43,37.63 46.76,37.3 R65.2@47.7,37.3
NetK1_5: K1.5 R69.2 VD15.1 | length 13.9
  Top Layer w1: K1.5@37.19,42.61 37.286,42.706 38.736,42.706 39.14,43.11 41.31,43.11 44.1,45.9 VD15.1@44.1,46.9 45.1,45.9 R69.2@48.3,45.9
NetK1_8: K1.8 R74.1 | length 8.6
  Top Layer w1: K1.8@37.19,34.99 40.61,34.99 40.61,29.89 R74.1@40.7,29.8
NetK2_2: K2.2 R66.1 | length 4.1
  Top Layer w1: K2.2@66.31,24.63 66.406,24.534 68.6,24.534 69.2,23.934 R66.1@69.2,23
NetK2_5: K2.5 R68.2 VD16.2 | length 17.2
  Top Layer w1: K2.5@58.69,29.71 58.786,29.806 58.786,31.851 59.035,32.1 60.8,32.1 ; VD16.2@60.8,35.2 60.8,32 69.5,32 R68.2@70.2,32.7
NetK2_8: K2.8 R72.1 R73.1 | length 7
  Top Layer w1: R72.1@55.7,26.6 55.9,26.6 55.9,22.8 R73.1@55.8,22.8 ; R73.1@56.1,22.8 56.658,22.8 57.273,22.186 58.594,22.186 K2.8@58.69,22.09
NetR14_2: R14.2 RP1.3 | length 10.8
  Top Layer w0.2: R14.2@14.9,109.7 14.9,107 19.66,102.24 RP1.3@19.66,100.865
NetR18_1: R18.1 R19.2 RP2.3 RP3.3 | length 15.4
  Top Layer w0.3: R19.2@54.3,131.1 R18.1@51.9,131.1 51.8,131 51.8,127.42 52.56,126.66 RP3.3@52.56,126.54 52.76,126.74 59.464,126.74 RP2.3@60.56,126.74
NetR20_1: R20.1 R21.2 RP2.1 RP3.1 | length 19.8
  Top Layer w0.3: RP3.1@55.1,124 55.504,124.404 55.504,125.124 55.68,125.3 61.5,125.3 62.6,124.2 RP2.1@63.1,124.2 63.1,129.6 R21.2@61.5,131.2 61.4,131.1 59,131.1 R20.1@58.9,131.2
NetR25_1: R25.1 RP2.2 | length 9
  Top Layer w0.5: R25.1@57.5,117.3 57.5,122.6 59.1,124.2 RP2.2@60.56,124.2
NetR26_1: R26.1 RP3.2 | length 6.9
  Top Layer w0.3: RP3.2@52.56,124 52.56,117.54 R26.1@52.9,117.2
NetR36_2: R36.2 R42.1 VD5.1 VT2.3 КТ6.1 | length 32.9
  Top Layer w0.5: VD5.1@19,119.3 17.7,119.3 ; R42.1@20.8,108.6 R36.2@30.1,108.6 ; R42.1@20.8,108.9 19.5,108.9 17.7,110.7 17.7,119.3 ; VT2.3@22.4,124.65 18.55,124.65 КТ6.1@18.4,124.8 17.7,124.1 17.7,119.3
NetR39_2: R39.2 R44.1 VD6.3 VT1.3 КТ7.1 | length 20
  Top Layer w0.3: R39.2@82,107.4 82.1,107.5 82.1,108.2 82.85,108.95 84.9,108.95 ; VT1.3@87.1,108.95 84.9,108.95 ; R44.1@94.5,105.1 88.65,105.1 VD6.3@88.15,104.6 85.4,104.6 84.9,105.1 84.9,108.95
NetR42_2: R42.2 R45.1 VD5.3 VT2.4 | length 15
  Top Layer w0.2: R45.1@19.6,114.4 19.6,113.1 R42.2@20.8,111.9 ; R45.1@19.6,114.7 21.2,116.3 VD5.3@21.2,118.25 ; VD5.3@21.3,118.35 21.3,120.3 25,124 VT2.4@25,124.65
NetR44_2: R44.2 R47.2 R48.1 VD6.1 VT1.4 | length 19
  Top Layer w0.3: VD6.1@89.1,106.9 89.25,107.05 89.25,107.475 89.7,107.925 VT1.4@89.7,108.95 91.75,108.95 92.6,108.1 R44.2@94.5,108.1 94.7,108.3 95.8,108.3 97.7,110.2 97.7,113.8 R47.2@98,114.1 97.7,114.4 R48.1@97.7,117.4
NetR46_2: R46.2 R50.1 R51.1 VD8.3 VT2.1 VT2.2 VT2.5 VT2.6 | length 29.3
  Top Layer w0.8: VT2.2@22.4,125.6 VT2.5@25,125.6
  Top Layer w0.85: VT2.5@25,125.6 VT2.6@25,126.55
  Top Layer w1: 23.7,126.55 23.7,132.4 23.5,132.6 R46.2@23.5,134.7 23.5,137.045 23.855,137.4 24.204,137.4 24.504,137.1 R51.1@25.6,137.1 25.8,136.9 26.639,136.9 26.785,137.045 34.845,137.045 R50.1@35.4,137.6
  Top Layer w1.2: VT2.1@22.4,126.55 23.7,126.55 VT2.6@25,126.55
NetR49_2: R49.2 VD9.3 VT1.1 VT1.2 VT1.5 VT1.6 | length 29.6
  Top Layer w1.5: 87.45,110.5 89.7,110.5 93.1,110.5
  Top Layer w2: 93.1,110.5 94.9,112.3 R49.2@94.9,116.5 94.9,118 94.8,118.1 VD9.3@94.8,133.65
NetR53_1: R53.1 VD11.1 | length 12
  Top Layer w0.2: VD11.1@39.84,6.9 39.94,6.8 40.683,6.8 40.783,6.7 46.6,6.7 49.7,3.6 R53.1@50.5,3.6
NetR54_1: R54.1 VD12.2 | length 11.3
  Top Layer w0.2: VD12.2@39.94,9.3 39.98,9.34 48.76,9.34 R54.1@50.5,7.6
NetR57_1: R57.1 VD13.1 | length 7.8
  Top Layer w1: VD13.1@91.306,40.2 R57.1@91.306,48.006
NetR58_1: R58.1 VD13.3 | length 8.4
  Top Layer w1: VD13.3@84.094,40.2 85.2,41.306 R58.1@85.2,48.1
NetR71_1: R71.1 R76.1 VD14.4 VD15.2 VT4.3 | length 74.2
  Top Layer w0.5: R71.1@35.2,22.8 R71.1@35,22.8 ; VD15.2@40.7,46.9 39.253,46.9 ; VD14.4@42.6,62.8 39.253,59.453 39.253,46.9 ; R76.1@49.1,12.95 46.65,15.4 VT4.3@44.1,15.4 44.1,11.3 37.6,11.3 35,13.9 R71.1@35,22.8 ; R71.1@35,22.8 35,42.946 36.204,44.15 36.503,44.15 39.253,46.9
NetR71_2: R71.2 R74.2 VT4.1 | length 17.1
  Top Layer w1: VT4.1@39.1,15.4 39.1,21.9 R71.2@38.2,22.8 43.7,28.3 R74.2@43.7,29.8
NetR72_2: R72.2 R75.1 VD14.1 VD16.1 VT3.3 | length 80.1
  Top Layer w1: R72.2@55.7,29.6 55.7,33.5 VD16.1@57.4,35.2 57.4,40.1 67.4,40.1 68.1,40.8 ; VD14.1@67.6,62.8 67.6,41.3 68.1,40.8 ; R75.1@78.7,12.25 74.65,12.25 VT3.3@72.8,14.1 72.8,16.9 73.3,17.4 73.3,35.6 68.1,40.8
NetR73_2: R73.2 VT3.1 | length 14.6
  Top Layer w1: R73.2@56.1,19.8 56.1,18.8 63.1,18.8 VT3.1@67.8,14.1
NetVD11_2: VD11.2 XP5.1 | length 12.2
  Top Layer w0.2: XP5.1@27.72,2.9 27.72,4.16 29.66,6.1 36.76,6.1 VD11.2@37.56,6.9
NetVD12_1: VD12.1 XP5.5 | length 9
  Top Layer w0.2: v1(36.1,9.5) 36.3,9.3 VD12.1@37.66,9.3
  Bottom Layer w0.2: v1(36.1,9.5) 36.1,8.78 37.88,7 XP5.5@37.88,2.9
OVLI,2: DA8.2 DD1.2 DD3.2 DD3.6 | length 135
  Top Layer w0.2: DA8.2@17.567,47.669 18.55,47.669 18.671,47.79 20.921,47.79 25.513,52.382 25.513,52.689 27.16,54.335 31.065,54.335 35.6,58.871 35.6,64.1 41.95,70.45 52.05,70.45 56.9,75.3 v1(59.5,75.3) 65.5,75.3 69.8,75.3 69.8,74.3 70.2,73.9 79.589,73.9 79.989,73.5 v1(92.55,73.5) ; DD1.2@58.6,86.01 58.677,86.087 59.579,86.087 59.583,86.09 59.783,86.09 59.9,85.973 v1(59.9,80.2) ; DD3.6@92.5,93.69 94.39,93.69 ; DD3.2@92.5,98.77 94.13,98.77 94.39,98.51 94.39,93.69 ; v1(93.9,81.7) 93.55,82.05 93.55,87.1 94.6,87.1 95.05,87.55 95.05,93.15 94.45,93.75 ; 94.36,93.84 94.3,93.9 94.3,93.78 94.39,93.69
  Bottom Layer w0.2: v1(59.5,75.3) 59.9,75.7 v1(59.9,80.2) ; v1(92.55,73.5) 92.45,73.4 92.45,78.828 93.9,80.278 v1(93.9,81.7)
OVLI,2n: DA8.6 XP1.14 | length 20.1
  Top Layer w0.2: XP1.14@4.7,28 9.6,32.9 9.6,41.498 DA8.6@12.833,44.731
S+: DA14.7 DA14.10 R22.1 КТ2.1 | length 11.5
  Top Layer w0.2: КТ2.1@47.4,106.1 47.5,106 R22.1@51,106 50.9,105.9 50.9,103.62 DA14.7@50.92,103.6 DA14.10@50.92,98.176
S-: DA14.2 DA14.15 R23.1 КТ3.1 | length 12.6
  Top Layer w0.2: DA14.15@57.27,98.176 DA14.2@57.27,103.6 57.27,105.97 R23.1@57.3,106 60.569,106 60.785,105.783 60.785,105.315 КТ3.1@61.3,104.8
pads on no net: ADG433.1 ADG433.2 ADG433.3 ADG433.6 ADG433.7 ADG433.8 ADG433.9 ADG433.10 ADG433.11 ADG433.14 ADG433.15 ADG433.16 DA2.6 DA2.10 DA2.11 DA2.14 DA3.6 DA3.10 DA3.11 DA3.14 DA5.6 DA5.10 DA5.11 DA5.14 DA7.1 DA7.3 DA7.5 DA7.7 DA7.8 DA9.6 DA10.7 DA15.8 DA16.8 DA20.5 DA20.6 DA21.5 DA21.6 DD1. DD1.8 DD1.9 DD1.10 DD1.11 DD1.12 DD1.13 DD2. DD2.3 DD2.11 DD3. DD3.8 DD3.9 DD3.10 DD3.11 DD3.12 DD3.13 Designator114.TH13 Designator114.TH14 Designator114.TH15 K1.1 K1.4 K1.6 K1.7 K2.1 K2.4 K2.6 K2.7 R77.OTV R78.OTV VD5.2 VD6.2 VD8.2 VD9.2 VD10.2 VT1. VT2. XP1.18
copper on no net: | length 3.3
  Top Layer w0.2: 29.967,21.369 31.798,23.2 32.5,23.2

## Polygon pours and split planes (outlines as drawn)
GND on Top Layer "Main_GND" (solid, pour order 19): 65,131.1 65,124.2 70.1,124.2 70,124.3 70,131.1
GND on Top Layer "Main_GND" (solid, pour order 17): 43.1,131 43.1,124.3 48.3,124.3 48.3,131
GND on Top Layer "NONET_L01_P-001" (solid, pour order 4): 16.9,12.2 16.9,1.6 21.7,1.6 21.7,12.2
GND on Bottom Layer "Main_GND" (solid, pour order 16): 42.8,128.1 50.9,136.2 60.8,136.2 70,127 70,120.8 42.9,120.8 42.8,120.7
GND on Bottom Layer "NONET_L01_P-001" (solid, pour order 13): 18.1,12.3 16.9,11.1 16.9,1.3 17.9,0.3 44.8,0.3 46.6,2.1 46.6,6.6 45.6,7.6 42.5,7.6 39.4,4.5 39.4,2.2 38.7,1.5 22.1,1.5 21.7,1.9 21.7,11.2 20.6,12.3
GND on Multi-Layer "Main_GND" (solid, pour order 15): 107.6,107 100.7,107 100.7,105.7 100.7,92 107.6,92 107.7,91.9

## Keep-outs
Keep-Out Layer:
  circle w0.05: c100,69 r0.025
  circle w0.05: c0,75 r0.025
  circle w0.05: c88,150 r0.025
  circle w0.05: c110,138 r0.025
  lines w0.1: 88,0 110,0 ; 98,0.1 98,12.1 110,12.1 110,0.1 ; 98,150 110,150 110,138 ; 0,0 0,12 12,12 12,0 0,0 ; 0,69 0,81 12,81 12,69 0,69 ; 0,138 0,150 12,150 12,138 0,138 ; 98,69 98,81 110,81 110,69 98,69

## Other copper
Top Layer:
  rectangle net -15V: 13.7,6.5 15.551,11.2
  rectangle net +15V: 22.58,6.2 24.8,12.32

## Silkscreen, mask and mechanical layers (free items; w line width, h text height)
Top Overlay:
  lines w0.3: 77,54.4 82.3,54.4 ; 77.225,29.025 82.225,29.025 ; 77.9,48.1 79.2,48.1 82.1,48.1 ; 78.319,35.219 78.4,35.3 81.9,35.3 ; 78.4,41.8 82.1,41.8
  text "-100" at 51.062,142.058 h3
  text "+100" at 58.762,141.658 h3
  text "7" at 27.7,139.6 h2.5
  text "6" at 40.8,138.9 h2.5
  text "5" at 43.6,138.9 h2.5
  text "1" at 78.3,138.8 h2.5
  text "3" at 63.6,138.7 h2.5
  text "2" at 75.6,138.7 h2.5
  text "HANDLE" at 22.1,95.1 h1.5
  text "DAC" at 24.2,89.3 h1.5
  text "IMPc" at 40.3,88.1 h1.5
  text "4" at 100.002,81.9 h2.5
  text "GND" at 44,80.2 h1.5
  text "-100" at 73.9,72.7 h3
  text "+100" at 83.1,72.7 h3
  text "~" at 48.7,65.427 h5
  text "-" at 41.4,65.261 h5
  text "~" at 56.3,65.127 h5
  text "+" at 69.7,65.09 h5
  text "687253.017" at 107.4,57.2 h3 r270
  text "-70V" at 44.3,53.7 h3
  text "+70V" at 58.2,49.5 h3
  text "758725.629-2" at 107.3,42.9 h3 r270
Bottom Overlay:
  lines w0.15: 21.2,140.8 cw(c21.2,140.559) 21.371,140.729 ; 22.2,138 42.635,117.565 cw(c41.15,116.08) 43.25,116.08 43.25,56.454 ; 54.3,138.3 cw(c54.3,138.242) 54.341,138.283 76.002,116.622 cw(c73.834,114.454) 76.9,114.454 76.9,73 ; 58.1,48.8 58.1,108.93 cw(c61.166,108.93) 58.998,111.098 86.3,138.4 ; 61.703,138 61.7,138 ccw(c61.703,138) 61.701,137.998 87.15,112.549 ; 87.102,112.598 cw(c84.934,110.43) 88,110.43 88,72.6
  text "-100" at 55.8,141.9 h3
  text "+100" at 63.4,141.6 h3
  text "23" at 88.275,141.488 h2.5
  text "24" at 21.575,141.288 h2.5
  text "16" at 53.9,134.9 h3
  text "15" at 60.9,134.7 h3
  text "13" at 90.9,70.9 h3
  text "14" at 79.7,70.6 h3
  text "-70V" at 41.9,56.5 h3
  text "22" at 49.597,51.9 h3
  text "+70V" at 63.9,49.5 h3
  text "687253.017" at 107.3,45.3 h3 r270
  text "21" at 67.697,44.9 h3
  text "758725.629-2" at 107.4,26.2 h3 r270
  text "758725.629-2" at 74.6,6 h2
  text "687253.017" at 74,3 h2
Mechanical 1:
  circle w0.1: c97.585,84.568 r0.75
  circle w0.1: c103.736,84.568 r1.5
  circle w0.1: c81.339,145.49 r1.5
  circle w0.1: c66.338,145.473 r1.5
  circle w0.1: c73.838,145.49 r1.5
  circle w0.1: c46.339,145.566 r1.5
  circle w0.1: c81.339,139.606 r0.75
  circle w0.05: c106.264,146.137 r0.025
  circle w0.05: c12,150 r0.025
  circle w0.05: c110,81 r0.025
  circle w0.05: c0,145 r0.025
  circle w0.05: c5,0 r0.025
  circle w0.1: c5,145 r1.7
  circle w0.1: c5,5 r1.7
  circle w0.1: c105,75 r1.7
  circle w0.1: c105,145 r1.7
  circle w0.1: c31.338,139.606 r0.75
  circle w0.1: c46.339,139.606 r0.75
  circle w0.1: c38.838,139.606 r0.75
  circle w0.1: c31.338,145.55 r1.5
  circle w0.1: c38.838,145.566 r1.5
  circle w0.1: c73.839,139.606 r0.75
  circle w0.1: c66.338,139.606 r0.75
  region: 3.292,145 3.3,145
  lines w0.1: 30.979,147.506 cw(c31.338,146.05) 32.238,147.25 ; 65.979,144.017 ccw(c66.338,145.473) 67.238,144.273 ; 65.979,147.43 cw(c66.338,145.973) 67.238,147.173 ; 72.938,144.29 ccw(c73.838,145.49) 72.938,146.69 ; 80.439,144.29 ccw(c81.339,145.49) 80.439,146.69 ; 102.536,85.468 ccw(c103.736,84.568) 104.936,85.468
Board:
  the board outline again, w0.1
Top Assembly:
  text "24" at 21.575,141.288 h2.5
  text "7" at 27.6,139.6 h2.5
  text "6" at 40.8,138.9 h2.5
  text "5" at 43.6,138.9 h2.5
  text "3" at 63.6,138.7 h2.5
  text "2" at 75.6,138.7 h2.5
  text "1" at 78.7,138.6 h2.5
  text "4" at 100.002,81.9 h2.5
  text "+" at 17.6,0.178 h2
  text "+" at 23.3,0.178 h2
  text "-" at 14.5,0.132 h2
  text "-" at 20.2,0.132 h2
Mechanical 13:
  lines w0.15: 2.5,5 7.5,5 ; 2.5,75 7.5,75 ; 2.5,145 7.5,145 ; 5,2.5 5,7.5 ; 5,72.5 5,77.5 ; 5,142.5 5,147.5 ; 28.838,145.55 33.838,145.55 ; 29.3,140.6 30.294,139.606 33.838,139.606 ; 31.338,137.106 31.338,142.106 ; 31.338,143.05 31.338,148.05 ; 36.338,139.606 41.338,139.606 ; 36.338,145.566 41.338,145.566 ; 38.838,143.066 38.838,148.066 ; 38.838,137.106 38.838,142.106 ; 43.839,139.606 48.839,139.606 ; 43.839,145.566 48.839,145.566 ; 46.339,137.106 46.339,142.106 ; 46.339,143.066 46.339,148.066 ; 60,25 65,25 ; 60,32.5 65,32.5 ; 60,40 65,40 ; 60,47.5 65,47.5 ; 60,55 65,55 ; 62.5,22.5 62.5,27.5 ; 62.5,30 62.5,35 ; 62.5,37.5 62.5,42.5 ; 62.5,45 62.5,50 ; 62.5,52.5 62.5,57.5 ; 63.838,139.606 68.838,139.606 ; 63.838,145.473 68.838,145.473 ; 66.338,137.106 66.338,142.106 ; 66.338,142.973 66.338,147.973 ; 71.339,139.606 76.339,139.606 ; 71.338,145.49 76.338,145.49 ; 73.838,142.99 73.838,147.99 ; 73.839,137.106 73.839,142.106 ; 77.5,15 82.5,15 ; 77.5,65 82.5,65 ; 78.839,139.606 83.839,139.606 ; 78.839,145.49 83.839,145.49 ; 80,12.5 80,17.5 ; 80,62.5 80,67.5 ; 81.339,137.106 81.339,142.106 ; 81.339,142.99 81.339,147.99 ; 87.475,55 92.475,55 ; 87.5,25 92.5,25 ; 88.085,91.568 93.085,91.568 ; 89.975,52.5 89.975,57.5 ; 90,22.5 90,27.5 ; 90.585,89.068 90.585,94.068 ; 92.5,5 97.5,5 ; 92.5,145 97.5,145 ; 94.236,91.568 99.236,91.568 ; 95,2.5 95,7.5 ; 95,142.5 95,147.5 ; 96.736,89.068 96.736,94.068
Bottom Assembly:
  text "23" at 88.275,141.488 h2.5

## Text inside footprints (layer, text, board x,y; h text height)
C38: Top Overlay "+" at 22.54,4.347 h1.5
C39: Top Overlay "+" at 29.6,7.6 h2 r180
C40: Top Overlay "+" at 17.07,4.426 h1.5
C45: Top Overlay "+" at 86.5,66.8 h2 r90
C46: Top Overlay "+" at 78.2,62.4 h2 r270
VD13: Top Overlay "~" at 88.558,46.715 h3 r135; Top Overlay "~" at 88.558,33.634 h3 r135; Top Overlay "-" at 82.088,40.245 h3 r135; Top Overlay "+" at 95.123,40.552 h4 r135
VD14: Top Overlay "-" at 41.6,61.114 h3 r180; Top Overlay "+" at 69.6,61.236 h3 r180